# Altium PCB LED_Panel.PcbDoc
Units mil, origin at the board's own origin, x right, y up, seen from the top; angles counter-clockwise.
Board outline 1181.1 x 1181.1 mil, 2 copper layers (Top Layer, Bottom Layer); 128 components, 67 nets, 390 pads, 89 vias.
Unrouted connection lines stored in the file: 39.
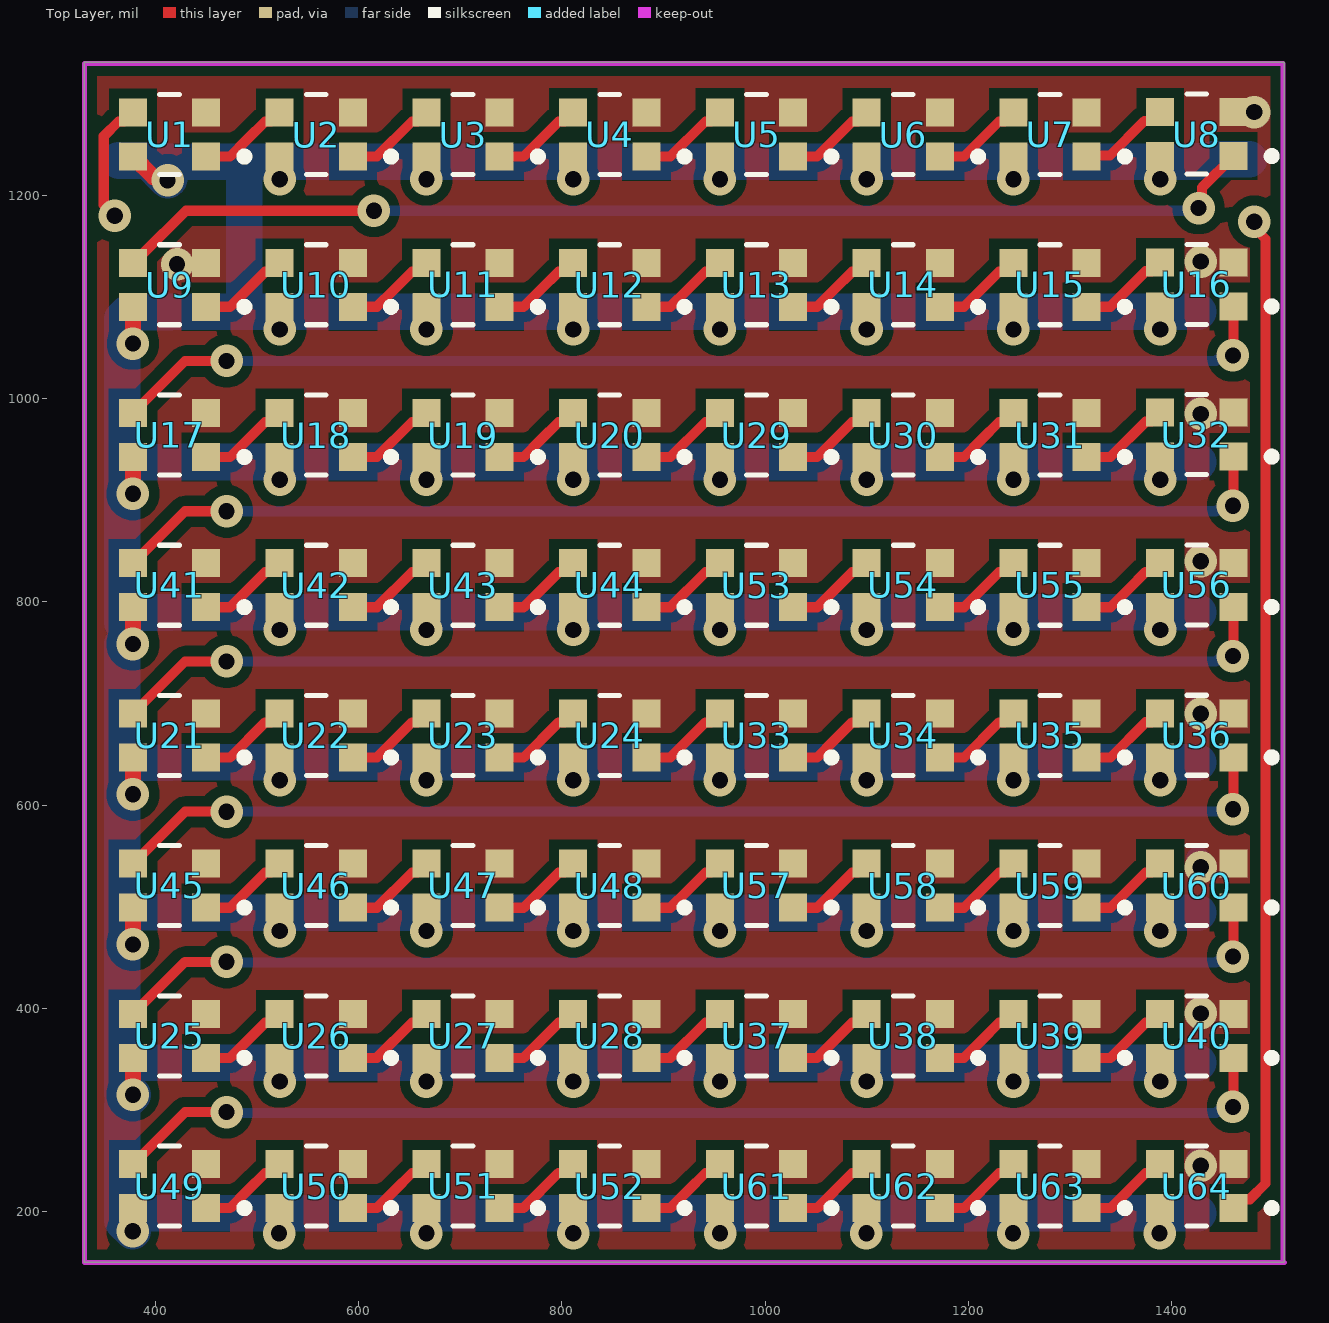
[diagram p0: Top Layer view]
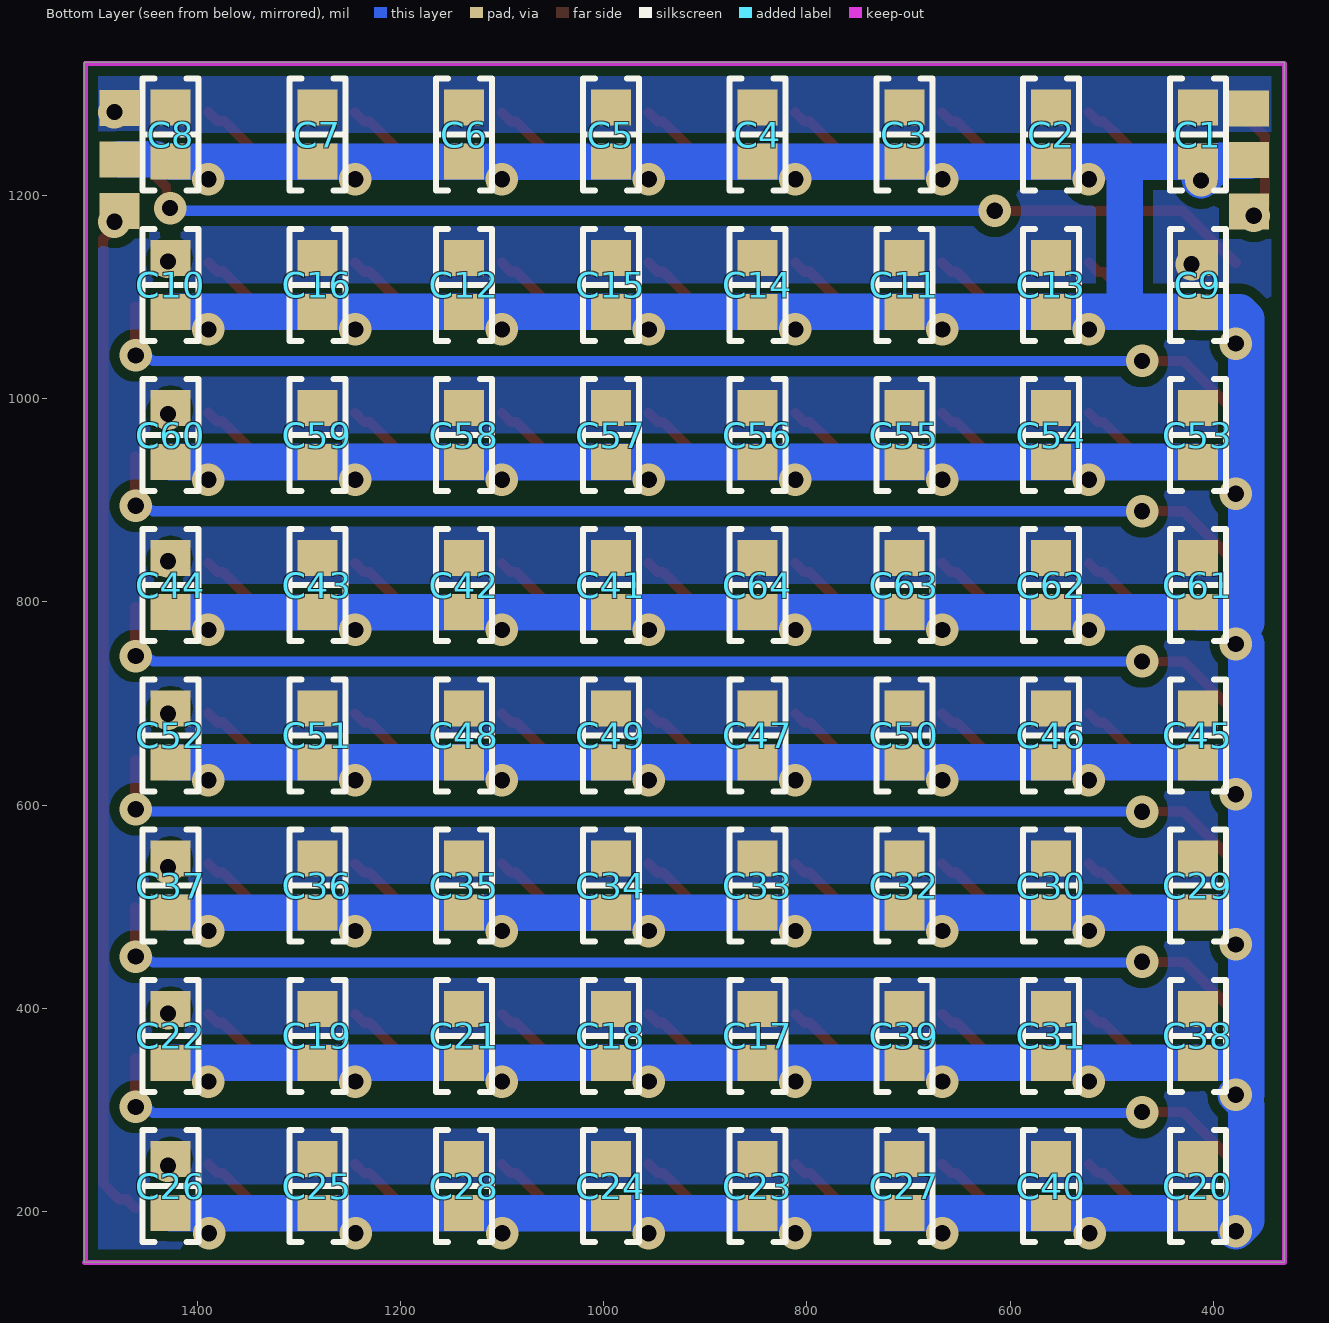
[diagram p1: Bottom Layer view, seen from below]
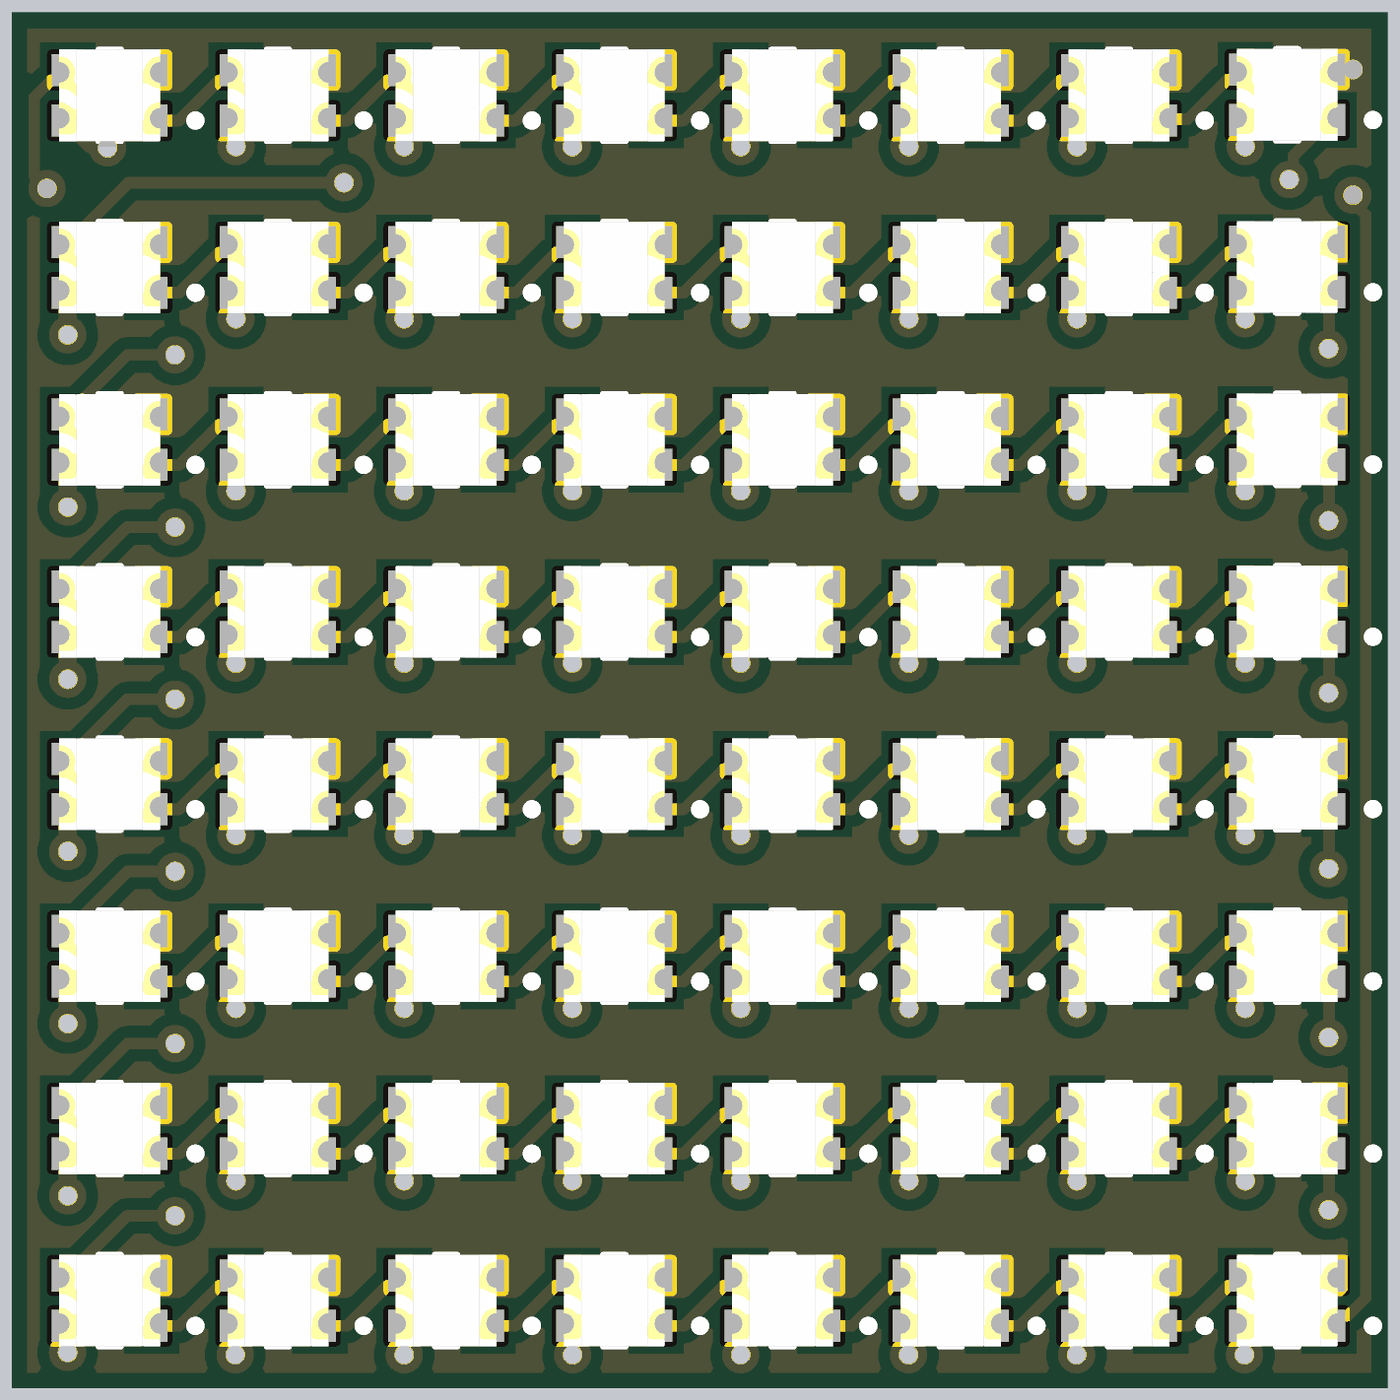
[diagram p2: 3D render of the assembled board from above, using the file's embedded part models]
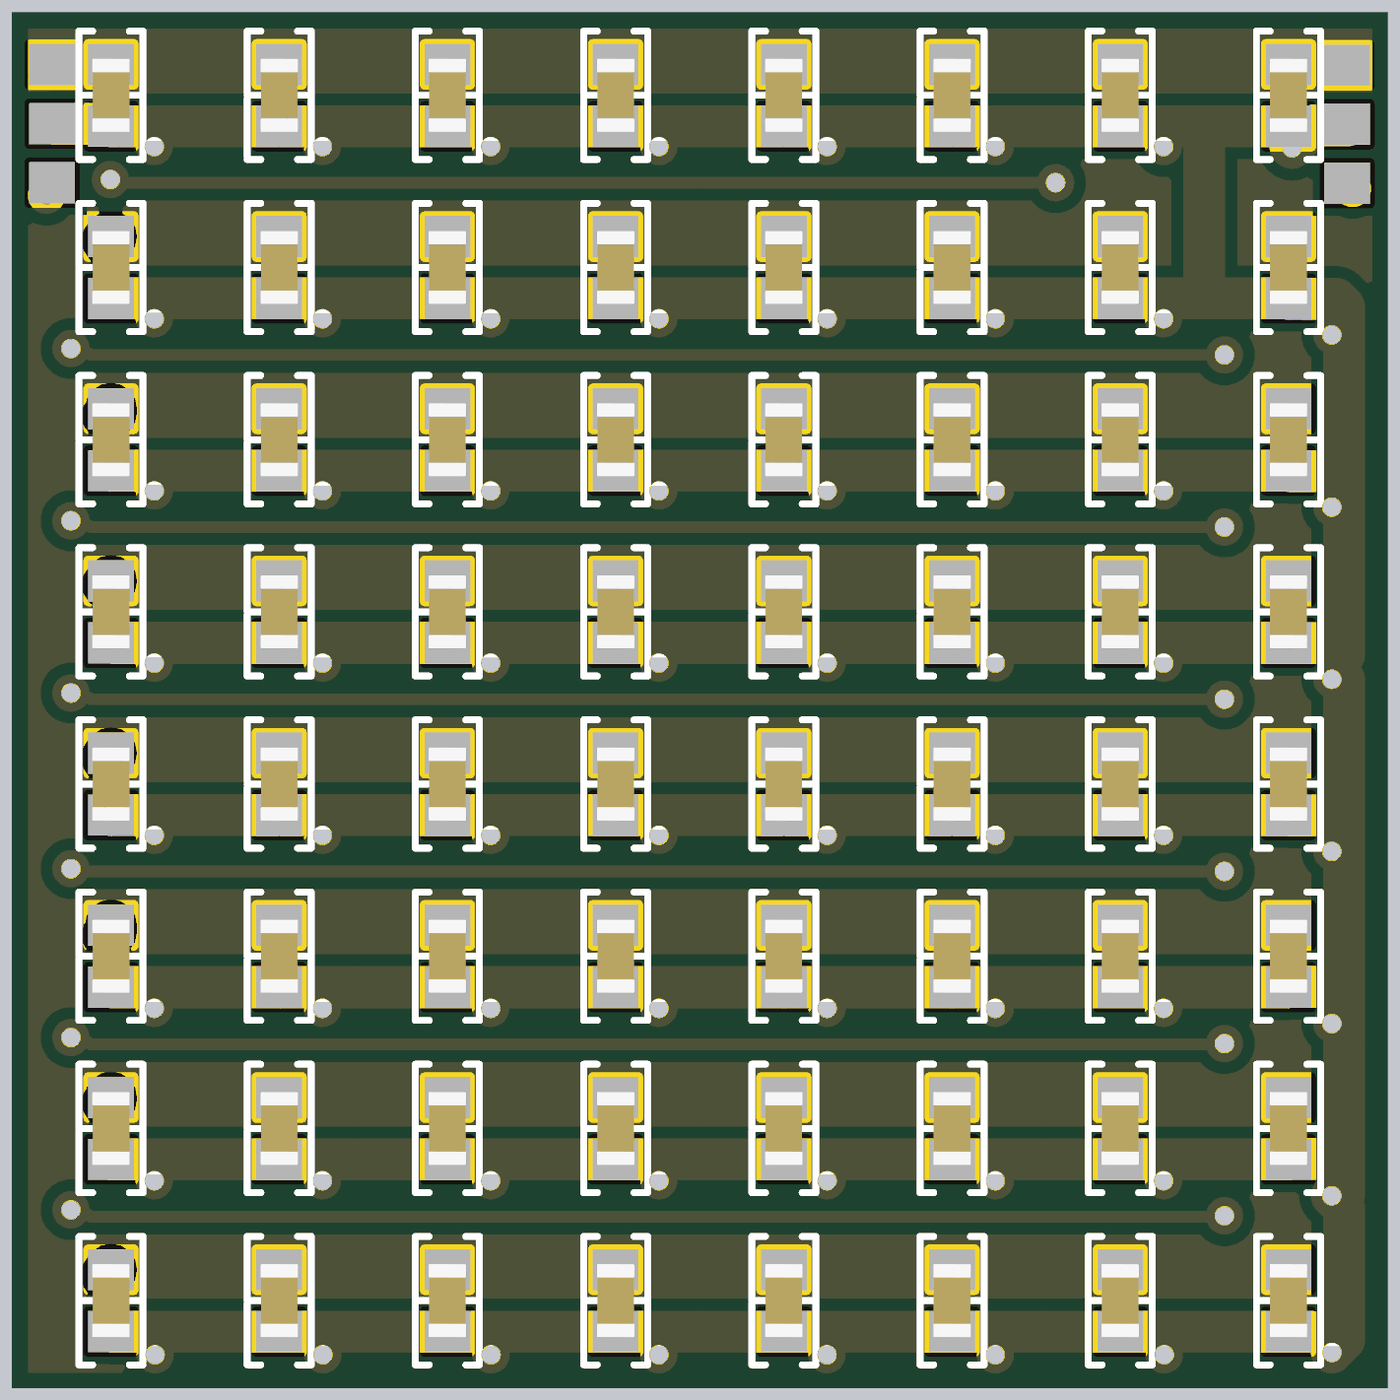
[diagram p3: 3D render of the assembled board from below, using the file's embedded part models]

## Layer stack, top to bottom
Top Solder: solder mask 0.4, Solder Resist, Dk 3.5
Top Layer: signal copper 1.4
Dielectric 1: dielectric 12.6, FR-4, Dk 4.8
Bottom Layer: signal copper 1.4
Bottom Solder: solder mask 0.4, Solder Resist, Dk 3.5

## Board outline
330,150 1511.1,150 1511.1,1331.1 330,1331.1

## Design rules (kind name [scope] priority, off if disabled: settings)
Clearance [All] p1: gap=10 ignorepadtopadclearanceinfootprint=FALSE except(0: Arc-Hole Track-Hole SMDPad-Hole THPad-Hole Via-Hole Fill-Hole Poly-Hole Region-Hole Text-Hole)
MinimumSolderMaskSliver [All] p1 off: minsoldermaskwidth=10
PolygonConnect PolygonConnect_2 [InNet('GND')] p1: connectstyle=Direct reliefconductorwidth=10 reliefentries=4 polygonreliefangle="90 Angle" airgapwidth=10
PolygonConnect PolygonConnect_1 [All] p2: connectstyle=Relief reliefconductorwidth=10 reliefentries=4 polygonreliefangle="90 Angle" airgapwidth=10
RoutingVias [All] p1: holewidth=16 width=32 viastyle="Through Hole" minholewidth=10 minwidth=10 maxholewidth=28 maxwidth=50
SilkToSilkClearance [All] p1 off: silktosilkclearance=10
SilkToSolderMaskClearance [IsPad] p1 off: minsilkscreentomaskgap=10 clearancetoexposedcopper=TRUE
SolderMaskExpansion [All] p1: expansion=4 istentingtop=FALSE
Width [All] p1: maxlimit=100 minlimit=10 preferedwidth=10
27 further rules are at their usual default settings.

## Components (designator, comment, footprint, x,y, rotation, side; value= is the part's Value field where it differs from the comment)
C1 "0.1uF" "CAP 0603_1608" 415,1260 r270 bottom
C2 "0.1uF" "CAP 0603_1608" 559.45,1260 r270 bottom
C3 "0.1uF" "CAP 0603_1608" 703.89,1260 r270 bottom
C4 "0.1uF" "CAP 0603_1608" 848.34,1260 r270 bottom
C5 "0.1uF" "CAP 0603_1608" 992.79,1260 r270 bottom
C6 "0.1uF" "CAP 0603_1608" 1137.24,1260 r270 bottom
C7 "0.1uF" "CAP 0603_1608" 1281.68,1260 r270 bottom
C8 "0.1uF" "CAP 0603_1608" 1426.13,1260 r270 bottom
C9 "0.1uF" "CAP 0603_1608" 415,1112.14 r270 bottom
C10 "0.1uF" "CAP 0603_1608" 1426.13,1112.14 r270 bottom
C11 "0.1uF" "CAP 0603_1608" 703.89,1112.14 r270 bottom
C12 "0.1uF" "CAP 0603_1608" 1137.24,1112.14 r270 bottom
C13 "0.1uF" "CAP 0603_1608" 559.45,1112.14 r270 bottom
C14 "0.1uF" "CAP 0603_1608" 848.34,1112.14 r270 bottom
C15 "0.1uF" "CAP 0603_1608" 992.79,1112.14 r270 bottom
C16 "0.1uF" "CAP 0603_1608" 1281.68,1112.14 r270 bottom
C17 "0.1uF" "CAP 0603_1608" 848.34,372.86 r270 bottom
C18 "0.1uF" "CAP 0603_1608" 992.79,372.86 r270 bottom
C19 "0.1uF" "CAP 0603_1608" 1281.68,372.86 r270 bottom
C20 "0.1uF" "CAP 0603_1608" 415,225 r270 bottom
C21 "0.1uF" "CAP 0603_1608" 1137.24,372.86 r270 bottom
C22 "0.1uF" "CAP 0603_1608" 1426.13,372.86 r270 bottom
C23 "0.1uF" "CAP 0603_1608" 848.34,225 r270 bottom
C24 "0.1uF" "CAP 0603_1608" 992.79,225 r270 bottom
C25 "0.1uF" "CAP 0603_1608" 1281.68,225 r270 bottom
C26 "0.1uF" "CAP 0603_1608" 1426.13,225 r270 bottom
C27 "0.1uF" "CAP 0603_1608" 703.89,225 r270 bottom
C28 "0.1uF" "CAP 0603_1608" 1137.24,225 r270 bottom
C29 "0.1uF" "CAP 0603_1608" 415,520.71 r270 bottom
C30 "0.1uF" "CAP 0603_1608" 559.45,520.71 r270 bottom
C31 "0.1uF" "CAP 0603_1608" 559.45,372.86 r270 bottom
C32 "0.1uF" "CAP 0603_1608" 703.89,520.71 r270 bottom
C33 "0.1uF" "CAP 0603_1608" 848.34,520.71 r270 bottom
C34 "0.1uF" "CAP 0603_1608" 992.79,520.71 r270 bottom
C35 "0.1uF" "CAP 0603_1608" 1137.24,520.71 r270 bottom
C36 "0.1uF" "CAP 0603_1608" 1281.68,520.71 r270 bottom
C37 "0.1uF" "CAP 0603_1608" 1426.13,520.71 r270 bottom
C38 "0.1uF" "CAP 0603_1608" 415,372.86 r270 bottom
C39 "0.1uF" "CAP 0603_1608" 703.89,372.86 r270 bottom
C40 "0.1uF" "CAP 0603_1608" 559.45,225 r270 bottom
C41 "0.1uF" "CAP 0603_1608" 992.79,816.43 r270 bottom
C42 "0.1uF" "CAP 0603_1608" 1137.24,816.43 r270 bottom
C43 "0.1uF" "CAP 0603_1608" 1281.68,816.43 r270 bottom
C44 "0.1uF" "CAP 0603_1608" 1426.13,816.43 r270 bottom
C45 "0.1uF" "CAP 0603_1608" 415,668.57 r270 bottom
C46 "0.1uF" "CAP 0603_1608" 559.45,668.57 r270 bottom
C47 "0.1uF" "CAP 0603_1608" 848.34,668.57 r270 bottom
C48 "0.1uF" "CAP 0603_1608" 1137.24,668.57 r270 bottom
C49 "0.1uF" "CAP 0603_1608" 992.79,668.57 r270 bottom
C50 "0.1uF" "CAP 0603_1608" 703.89,668.57 r270 bottom
C51 "0.1uF" "CAP 0603_1608" 1281.68,668.57 r270 bottom
C52 "0.1uF" "CAP 0603_1608" 1426.13,668.57 r270 bottom
C53 "0.1uF" "CAP 0603_1608" 415,964.29 r270 bottom
C54 "0.1uF" "CAP 0603_1608" 559.45,964.29 r270 bottom
C55 "0.1uF" "CAP 0603_1608" 703.89,964.29 r270 bottom
C56 "0.1uF" "CAP 0603_1608" 848.34,964.29 r270 bottom
C57 "0.1uF" "CAP 0603_1608" 992.79,964.29 r270 bottom
C58 "0.1uF" "CAP 0603_1608" 1137.24,964.29 r270 bottom
C59 "0.1uF" "CAP 0603_1608" 1281.68,964.29 r270 bottom
C60 "0.1uF" "CAP 0603_1608" 1426.13,964.29 r270 bottom
C61 "0.1uF" "CAP 0603_1608" 415,816.43 r270 bottom
C62 "0.1uF" "CAP 0603_1608" 559.45,816.43 r270 bottom
C63 "0.1uF" "CAP 0603_1608" 703.89,816.43 r270 bottom
C64 "0.1uF" "CAP 0603_1608" 848.34,816.43 r270 bottom
U1 "WS2812-2020" LED_WS2812-2020 413.87,1260 r0 top
U2 "WS2812-2020" LED_WS2812-2020 558.32,1260 r0 top
U3 "WS2812-2020" LED_WS2812-2020 702.76,1260 r0 top
U4 "WS2812-2020" LED_WS2812-2020 847.21,1260 r0 top
U5 "WS2812-2020" LED_WS2812-2020 991.66,1260 r0 top
U6 "WS2812-2020" LED_WS2812-2020 1136.1,1260 r0 top
U7 "WS2812-2020" LED_WS2812-2020 1280.55,1260 r0 top
U8 "WS2812-2020" LED_WS2812-2020 1425,1260.45 r0 top
U9 "WS2812-2020" LED_WS2812-2020 413.87,1112.14 r0 top
U10 "WS2812-2020" LED_WS2812-2020 558.32,1112.14 r0 top
U11 "WS2812-2020" LED_WS2812-2020 702.76,1112.14 r0 top
U12 "WS2812-2020" LED_WS2812-2020 847.21,1112.14 r0 top
U13 "WS2812-2020" LED_WS2812-2020 991.66,1112.14 r0 top
U14 "WS2812-2020" LED_WS2812-2020 1136.1,1112.14 r0 top
U15 "WS2812-2020" LED_WS2812-2020 1280.55,1112.14 r0 top
U16 "WS2812-2020" LED_WS2812-2020 1425,1112.53 r0 top
U17 "WS2812-2020" LED_WS2812-2020 413.87,964.29 r0 top
U18 "WS2812-2020" LED_WS2812-2020 558.32,964.29 r0 top
U19 "WS2812-2020" LED_WS2812-2020 702.76,964.29 r0 top
U20 "WS2812-2020" LED_WS2812-2020 847.21,964.29 r0 top
U21 "WS2812-2020" LED_WS2812-2020 413.87,668.57 r0 top
U22 "WS2812-2020" LED_WS2812-2020 558.32,668.57 r0 top
U23 "WS2812-2020" LED_WS2812-2020 702.76,668.57 r0 top
U24 "WS2812-2020" LED_WS2812-2020 847.21,668.57 r0 top
U25 "WS2812-2020" LED_WS2812-2020 413.87,372.86 r0 top
U26 "WS2812-2020" LED_WS2812-2020 558.32,372.86 r0 top
U27 "WS2812-2020" LED_WS2812-2020 702.76,372.86 r0 top
U28 "WS2812-2020" LED_WS2812-2020 847.21,372.86 r0 top
U29 "WS2812-2020" LED_WS2812-2020 991.66,964.29 r0 top
U30 "WS2812-2020" LED_WS2812-2020 1136.1,964.29 r0 top
U31 "WS2812-2020" LED_WS2812-2020 1280.55,964.29 r0 top
U32 "WS2812-2020" LED_WS2812-2020 1425,964.61 r0 top
U33 "WS2812-2020" LED_WS2812-2020 991.66,668.57 r0 top
U34 "WS2812-2020" LED_WS2812-2020 1136.1,668.57 r0 top
U35 "WS2812-2020" LED_WS2812-2020 1280.55,668.57 r0 top
U36 "WS2812-2020" LED_WS2812-2020 1425,668.76 r0 top
U37 "WS2812-2020" LED_WS2812-2020 991.66,372.86 r0 top
U38 "WS2812-2020" LED_WS2812-2020 1136.1,372.86 r0 top
U39 "WS2812-2020" LED_WS2812-2020 1280.55,372.86 r0 top
U40 "WS2812-2020" LED_WS2812-2020 1425,372.92 r0 top
U41 "WS2812-2020" LED_WS2812-2020 413.87,816.43 r0 top
U42 "WS2812-2020" LED_WS2812-2020 558.32,816.43 r0 top
U43 "WS2812-2020" LED_WS2812-2020 702.76,816.43 r0 top
U44 "WS2812-2020" LED_WS2812-2020 847.21,816.43 r0 top
U45 "WS2812-2020" LED_WS2812-2020 413.87,520.71 r0 top
U46 "WS2812-2020" LED_WS2812-2020 558.32,520.71 r0 top
U47 "WS2812-2020" LED_WS2812-2020 702.76,520.71 r0 top
U48 "WS2812-2020" LED_WS2812-2020 847.21,520.71 r0 top
U49 "WS2812-2020" LED_WS2812-2020 413.87,225 r0 top
U50 "WS2812-2020" LED_WS2812-2020 558.32,225 r0 top
U51 "WS2812-2020" LED_WS2812-2020 702.76,225 r0 top
U52 "WS2812-2020" LED_WS2812-2020 847.21,225 r0 top
U53 "WS2812-2020" LED_WS2812-2020 991.66,816.43 r0 top
U54 "WS2812-2020" LED_WS2812-2020 1136.1,816.43 r0 top
U55 "WS2812-2020" LED_WS2812-2020 1280.55,816.43 r0 top
U56 "WS2812-2020" LED_WS2812-2020 1425,816.68 r0 top
U57 "WS2812-2020" LED_WS2812-2020 991.66,520.71 r0 top
U58 "WS2812-2020" LED_WS2812-2020 1136.1,520.71 r0 top
U59 "WS2812-2020" LED_WS2812-2020 1280.55,520.71 r0 top
U60 "WS2812-2020" LED_WS2812-2020 1425,520.84 r0 top
U61 "WS2812-2020" LED_WS2812-2020 991.66,225 r0 top
U62 "WS2812-2020" LED_WS2812-2020 1136.1,225 r0 top
U63 "WS2812-2020" LED_WS2812-2020 1280.55,225 r0 top
U64 "WS2812-2020" LED_WS2812-2020 1425,225 r0 top

## Footprints (in the part's own frame and the unit in brackets; to place one, negate y for a bottom-side part, rotate by r counter-clockwise, add the part's x,y. Pads: shape width x height; smd on the part's side, far side on the other; paste and mask are expansions set on the pad)
"CAP 0603_1608" [mm] "Chip Capacitor, 2-Leads, Body 1.60x0.80mm, IPC Medium Density"
  rect 0.9x1 smd: 1(-0.675,0) 2(0.675,0)
  silkscreen extent -1.4,-0.7 1.4,0.7, body extent -0.8,-0.41 0.8,0.41, height 0.82
LED_WS2812-2020 [mm]
  rect 0.7x0.7 smd: 1(0.915,-0.55) 2(0.915,0.55) 3(-0.915,0.55) 4(-0.915,-0.55)
  silkscreen extent -0.25,-1 1.97,1, body extent -1.1,-1 1.1,1, height 0.84

## Part data
C1 C2 C3 C4 C5 C6 C7 C8 C9 C10 C11 C12 C13 C14 C15 C16 C17 C18 C19 C20 C21 C22 C23 C24 C25 C26 C27 C28 C29 C30 C31 C32 C33 C34 C35 C36 C37 C38 C39 C40 C41 C42 C43 C44 C45 C46 C47 C48 C49 C50 C51 C52 C53 C54 C55 C56 C57 C58 C59 C60 C61 C62 C63 C64: library part C0603C272F3GAC7867, "CAP CER 2700PF 25V NP0 0603", Capacitance="2700 pF", Device Package="0603 (1608 Metric)", manufacturer=KEMET, Operating Temperature="-55°C ~ 125°C", Supplier Part Number 1=399-17403-1-ND, Temperature Coefficient="C0G, NP0", Tolerance=±1%, Voltage - Rated=25V, Applications="General Purpose", componentlink1description=Datasheet, componentlink1url=https://api.kemet.com/component-edge/download/datasheet/C0603C272F3GACTU.pdf, componentlink2description="DigiKey Link", componentlink2url=https://www.digikey.com/en/products/detail/kemet/C0603C272F3GAC7867/2200413, Features="Low ESL", lastupdated="2022/5/23 下午 12:55:07", Lifecycle Status=Active, Minimum Order=1, Mounting Type="Surface Mount, MLCC", Package / Case="0603 (1608 Metric)", packaging=TapeAndReel, Part Number=C0603C272F3GAC7867, Part Status=Active, partid=2138, price=0.46, series="SMD Comm C0G", Size / Dimension="0.063\" L x 0.031\" W (1.60mm x 0.80mm)", Supplier 1=DigiKey, Thickness (Max)="0.034\" (0.87mm)"
U1 U2 U3 U4 U5 U6 U7 U8 U9 U10 U11 U12 U13 U14 U15 U16 U17 U18 U19 U20 U21 U22 U23 U24 U25 U26 U27 U28 U29 U30 U31 U32 U33 U34 U35 U36 U37 U38 U39 U40 U41 U42 U43 U44 U45 U46 U47 U48 U49 U50 U51 U52 U53 U54 U55 U56 U57 U58 U59 U60 U61 U62 U63 U64: Package=None, Availability=Unavailable, MF="{'manufacturer': u'Worldsemi'}", MP=WS2812-2020, price=None

## Free pads (board coordinates)
  rect 39.37x35.43 smd far side: 1(364.63,1235.11) 1(1476.7,1235.66) 2(364.63,1184.45) 2(1476.7,1185) 3(364.63,1285.76) 3(1476.7,1286.32)

## Via types
v1: diameter 32, hole 16, Top Layer to Bottom Layer, tented both sides, 89 vias

## Nets (pads, with @x,y where several pads share a name; then routed paths per layer and width w, separated by ;. In a path a pad name is that pad's centre, name@x,y a point inside that pad or via, vN(x,y) a via of type N, cw(c..) or ccw(c..) an arc to the next point about the centre after c; other vN are vias at no path point)
DIN: pad.2@364.63,1184.45 U1.3 | length 126.3
  Top Layer w10: v1(360,1180) 349.06,1190.93 349.06,1258.34 363.6,1272.87 369.06,1272.87 U1.3
  Bottom Layer w10: pad.2@360,1175 v1(360,1180)
DO1: U4.1 U5.3 | length 90.3
  Top Layer w10: U4.1 906.86,1238.35 941.39,1272.87 946.85,1272.87 U5.3
DO2: U8.1 U9.3 | length 1136.5
  Top Layer w10: U9.3 386.62,1142.58 387.58,1142.58 430,1185 v1(615,1185) ; v1(1426.68,1187.68) 1430.21,1191.21 1430.21,1207.98 U8.1
  Bottom Layer w10: v1(615,1185) 1424,1185 v1(1426.68,1187.68)
DO3: U12.1 U13.3 | length 90.3
  Top Layer w10: U12.1 906.86,1090.49 923.83,1107.45 941.39,1125.02 946.85,1125.02 U13.3
DO4: U16.1 U17.3 | length 1153.9
  Top Layer w10: U17.3 429.05,1037.14 v1(470,1037.14) ; v1@1461.02,1043.1 U16.1
  Bottom Layer w10: v1(470,1037.14) 1443.65,1037.14 1444.89,1038.38 1456.3,1038.38 v1(1460.51,1042.59)
DO5: U20.1 U29.3 | length 90.3
  Top Layer w10: U20.1 906.86,942.63 941.39,977.16 946.85,977.16 U29.3
DO6: U32.1 U41.3 | length 1153.9
  Top Layer w10: U41.3 429.05,889.29 v1(470,889.29) ; v1@1461.02,895.18 U32.1
  Bottom Layer w10: v1(470,889.29) 1415.21,889.29 1443.65,889.29 1444.83,890.46 1456.3,890.46 v1(1460.51,894.67)
DO7: U44.1 U53.3 | length 90.3
  Top Layer w10: U44.1 906.86,794.77 941.39,829.3 946.85,829.3 U53.3
DO8: U21.3 U56.1 | length 1153.9
  Top Layer w10: U21.3 429.05,741.43 v1(470,741.43) ; v1@1461.02,747.26 U56.1
  Bottom Layer w10: v1(470,741.43) 1443.65,741.43 1444.76,742.54 1456.3,742.54 v1(1460.51,746.75)
DO9: U24.1 U33.3 | length 90.3
  Top Layer w10: U24.1 906.86,646.92 941.39,681.45 946.85,681.45 U33.3
DO10: U36.1 U45.3 | length 1152.6
  Top Layer w10: U45.3 429.05,593.57 v1(470,593.57) ; v1@1461.02,596.42 U36.1@1461.02,644.19
  Bottom Layer w10: v1(470,593.57) 1458.18,593.57 v1(1460.51,595.91)
DO11: U48.1 U57.3 | length 90.3
  Top Layer w10: U48.1 906.86,499.06 923.83,516.03 941.39,533.59 946.85,533.59 U57.3
DO12: U25.3 U60.1 | length 1154.4
  Top Layer w10: U25.3 429.05,445.71 v1(470,445.71) ; v1@1461.02,451.42 U60.1
  Bottom Layer w10: v1(470,445.71) 470.71,445 1443.65,445 1445.35,446.7 1456.3,446.7 v1(1460.51,450.91)
DO13: U28.1 U37.3 | length 90.3
  Top Layer w10: U28.1 906.86,351.2 941.39,385.73 946.85,385.73 U37.3
DO14: U40.1 U49.3 | length 1154.5
  Top Layer w10: U49.3 429.05,297.86 v1(470,297.86) ; v1@1461.02,303.5 U40.1
  Bottom Layer w10: v1(470,297.86) 470.9,296.96 1443.65,296.96 1445.47,298.77 1456.3,298.77 v1(1460.51,302.98)
DO15: U52.1 U61.3 | length 90.3
  Top Layer w10: U52.1 906.86,203.35 923.83,220.31 941.39,237.87 946.85,237.87 U61.3
DOUT: pad.2@1476.7,1185 U64.1 | length 1003.6
  Top Layer w10: U64.1 1469.8,212.13 1477.13,212.13 1492.5,227.5 1492.5,1157.25 1481.5,1168.25 v1(1481.5,1174.2)
  Bottom Layer w10: v1(1481.5,1174.2) 1481.5,1184.8 pad.2@1481.7,1185
GND: C1.1 C2.1 C3.1 C4.1 C5.1 C6.1 C7.1 C8.1 C9.1 C10.1 C11.1 C12.1 C13.1 C14.1 C15.1 C16.1 C17.1 C18.1 C19.1 C20.1 C21.1 C22.1 C23.1 C24.1 C25.1 C26.1 C27.1 C28.1 C29.1 C30.1 C31.1 C32.1 C33.1 C34.1 C35.1 C36.1 C37.1 C38.1 C39.1 C40.1 C41.1 C42.1 C43.1 C44.1 C45.1 C46.1 C47.1 C48.1 C49.1 C50.1 C51.1 C52.1 C53.1 C54.1 C55.1 C56.1 C57.1 C58.1 C59.1 C60.1 C61.1 C62.1 C63.1 C64.1 pad.3 U1.2 U2.2 U3.2 U4.2 U5.2 U6.2 U7.2 U8.2 U9.2 U10.2 U11.2 U12.2 U13.2 U14.2 U15.2 U16.2 U17.2 U18.2 U19.2 U20.2 U21.2 U22.2 U23.2 U24.2 U25.2 U26.2 U27.2 U28.2 U29.2 U30.2 U31.2 U32.2 U33.2 U34.2 U35.2 U36.2 U37.2 U38.2 U39.2 U40.2 U41.2 U42.2 U43.2 U44.2 U45.2 U46.2 U47.2 U48.2 U49.2 U50.2 U51.2 U52.2 U53.2 U54.2 U55.2 U56.2 U57.2 U58.2 U59.2 U60.2 U61.2 U62.2 U63.2 U64.2 | length 44.7
  Bottom Layer w24: C26.1 1428.76,248.95 v1(1428.76,245) ; C22.1 1426.13,397.62 v1(1428.76,395) ; C37.1 1426.13,541.59 v1(1428.76,538.97) ; C52.1 1428.76,692.52 v1(1428.76,690) ; C44.1 1426.13,842.62 v1(1428.76,840) ; C60.1 1426.13,987.62 v1(1428.76,985) ; C10.1 1428.76,1136.09 v1(1428.76,1135)
  other v1: 421.28,1132.44 1481.5,1282.17
NetU1_1: U1.1 U2.3 | length 90.3
  Top Layer w10: U1.1 473.52,1238.35 490.49,1255.31 508.05,1272.87 513.51,1272.87 U2.3
NetU2_1: U2.1 U3.3 | length 90.3
  Top Layer w10: U2.1 617.97,1238.35 652.49,1272.87 657.96,1272.87 U3.3
NetU3_1: U3.1 U4.3 | length 90.3
  Top Layer w10: U3.1 762.41,1238.35 796.94,1272.87 802.41,1272.87 U4.3
NetU5_1: U5.1 U6.3 | length 90.3
  Top Layer w10: U5.1 1051.31,1238.35 1085.84,1272.87 1091.3,1272.87 U6.3
NetU6_1: U6.1 U7.3 | length 90.3
  Top Layer w10: U6.1 1195.76,1238.35 1230.28,1272.87 1235.75,1272.87 U7.3
NetU7_1: U7.1 U8.3 | length 90.5
  Top Layer w10: U7.1 1317.65,1239.42 1339.5,1239.42 1373.4,1273.32 1380.2,1273.32 U8.3
NetU9_1: U9.1 U10.3 | length 90.3
  Top Layer w10: U9.1 473.52,1090.49 508.05,1125.02 513.51,1125.02 U10.3
NetU10_1: U10.1 U11.3 | length 90.3
  Top Layer w10: U10.1 617.97,1090.49 634.93,1107.45 652.49,1125.02 657.96,1125.02 U11.3
NetU11_1: U11.1 U12.3 | length 90.3
  Top Layer w10: U11.1 762.41,1090.49 779.38,1107.45 796.94,1125.02 802.41,1125.02 U12.3
NetU13_1: U13.1 U14.3 | length 90.3
  Top Layer w10: U13.1 1051.31,1090.49 1068.27,1107.45 1085.84,1125.02 1091.3,1125.02 U14.3
NetU14_1: U14.1 U15.3 | length 90.3
  Top Layer w10: U14.1 1195.76,1090.49 1230.28,1125.02 1235.75,1125.02 U15.3
NetU15_1: U15.1 U16.3 | length 90.5
  Top Layer w10: U15.1 1339.82,1090.49 1374.73,1125.4 1380.2,1125.4 U16.3
NetU17_1: U17.1 U18.3 | length 90.3
  Top Layer w10: U17.1 473.52,942.63 508.05,977.16 513.51,977.16 U18.3
NetU18_1: U18.1 U19.3 | length 90.3
  Top Layer w10: U18.1 617.97,942.63 652.49,977.16 657.96,977.16 U19.3
NetU19_1: U19.1 U20.3 | length 90.3
  Top Layer w10: U19.1 762.41,942.63 779.38,959.6 796.94,977.16 802.41,977.16 U20.3
NetU21_1: U21.1 U22.3 | length 90.3
  Top Layer w10: U21.1 473.52,646.92 508.05,681.45 513.51,681.45 U22.3
NetU22_1: U22.1 U23.3 | length 90.3
  Top Layer w10: U22.1 617.97,646.92 652.49,681.45 657.96,681.45 U23.3
NetU23_1: U23.1 U24.3 | length 90.3
  Top Layer w10: U23.1 762.41,646.92 796.94,681.45 802.41,681.45 U24.3
NetU25_1: U25.1 U26.3 | length 90.3
  Top Layer w10: U25.1 473.52,351.2 490.49,368.17 508.05,385.73 513.51,385.73 U26.3
NetU26_1: U26.1 U27.3 | length 90.3
  Top Layer w10: U26.1 617.97,351.2 652.49,385.73 657.96,385.73 U27.3
NetU27_1: U27.1 U28.3 | length 90.3
  Top Layer w10: U27.1 762.41,351.2 779.38,368.17 796.94,385.73 802.41,385.73 U28.3
NetU29_1: U29.1 U30.3 | length 90.3
  Top Layer w10: U29.1 1051.31,942.63 1085.84,977.16 1091.3,977.16 U30.3
NetU30_1: U30.1 U31.3 | length 90.3
  Top Layer w10: U30.1 1195.76,942.63 1212.72,959.6 1230.28,977.16 1235.75,977.16 U31.3
NetU31_1: U31.1 U32.3 | length 90.5
  Top Layer w10: U31.1 1339.88,942.63 1374.73,977.48 1380.2,977.48 U32.3
NetU33_1: U33.1 U34.3 | length 90.3
  Top Layer w10: U33.1 1051.31,646.92 1068.27,663.88 1085.84,681.45 1091.3,681.45 U34.3
NetU34_1: U34.1 U35.3 | length 90.3
  Top Layer w10: U34.1 1195.76,646.92 1230.28,681.45 1235.75,681.45 U35.3
NetU35_1: U35.1 U36.3 | length 90.4
  Top Layer w10: U35.1 1340.01,646.92 1374.73,681.64 1380.2,681.64 U36.3
NetU37_1: U37.1 U38.3 | length 90.3
  Top Layer w10: U37.1 1051.31,351.2 1085.84,385.73 1091.3,385.73 U38.3
NetU38_1: U38.1 U39.3 | length 90.3
  Top Layer w10: U38.1 1195.76,351.2 1212.72,368.17 1230.28,385.73 1235.75,385.73 U39.3
NetU39_1: U39.1 U40.3 | length 90.4
  Top Layer w10: U39.1 1340.14,351.2 1374.73,385.8 1380.2,385.8 U40.3
NetU41_1: U41.1 U42.3 | length 90.3
  Top Layer w10: U41.1 473.52,794.77 508.05,829.3 513.51,829.3 U42.3
NetU42_1: U42.1 U43.3 | length 90.3
  Top Layer w10: U42.1 617.97,794.77 652.49,829.3 657.96,829.3 U43.3
NetU43_1: U43.1 U44.3 | length 90.3
  Top Layer w10: U43.1 762.41,794.77 796.94,829.3 802.41,829.3 U44.3
NetU45_1: U45.1 U46.3 | length 90.3
  Top Layer w10: U45.1 473.52,499.06 508.05,533.59 513.51,533.59 U46.3
NetU46_1: U46.1 U47.3 | length 90.3
  Top Layer w10: U46.1 617.97,499.06 652.49,533.59 657.96,533.59 U47.3
NetU47_1: U47.1 U48.3 | length 90.3
  Top Layer w10: U47.1 762.41,499.06 796.94,533.59 802.41,533.59 U48.3
NetU49_1: U49.1 U50.3 | length 90.3
  Top Layer w10: U49.1 473.52,203.35 490.49,220.31 508.05,237.87 513.51,237.87 U50.3
NetU50_1: U50.1 U51.3 | length 90.3
  Top Layer w10: U50.1 617.97,203.35 634.93,220.31 652.49,237.87 657.96,237.87 U51.3
NetU51_1: U51.1 U52.3 | length 90.3
  Top Layer w10: U51.1 762.08,203.35 796.61,237.87 802.41,237.87 U52.3
NetU53_1: U53.1 U54.3 | length 90.3
  Top Layer w10: U53.1 1051.31,794.77 1085.84,829.3 1091.3,829.3 U54.3
NetU54_1: U54.1 U55.3 | length 90.3
  Top Layer w10: U54.1 1195.76,794.77 1230.28,829.3 1235.75,829.3 U55.3
NetU55_1: U55.1 U56.3 | length 90.4
  Top Layer w10: U55.1 1339.95,794.77 1357.17,812 1374.73,829.56 1380.2,829.56 U56.3
NetU57_1: U57.1 U58.3 | length 90.3
  Top Layer w10: U57.1 1051.31,499.06 1085.84,533.59 1091.3,533.59 U58.3
NetU58_1: U58.1 U59.3 | length 90.3
  Top Layer w10: U58.1 1195.76,499.06 1230.28,533.59 1235.75,533.59 U59.3
NetU59_1: U59.1 U60.3 | length 90.4
  Top Layer w10: U59.1 1340.08,499.06 1374.73,533.72 1380.2,533.72 U60.3
NetU61_1: U61.1 U62.3 | length 90.3
  Top Layer w10: U61.1 1051.31,203.35 1085.84,237.87 1091.3,237.87 U62.3
NetU62_1: U62.1 U63.3 | length 90.3
  Top Layer w10: U62.1 1195.76,203.35 1230.28,237.87 1235.75,237.87 U63.3
NetU63_1: U63.1 U64.3 | length 90.3
  Top Layer w10: U63.1 1340.2,203.35 1374.73,237.87 1380.2,237.87 U64.3
VCC5V: C1.2 C2.2 C3.2 C4.2 C5.2 C6.2 C7.2 C8.2 C9.2 C10.2 C11.2 C12.2 C13.2 C14.2 C15.2 C16.2 C17.2 C18.2 C19.2 C20.2 C21.2 C22.2 C23.2 C24.2 C25.2 C26.2 C27.2 C28.2 C29.2 C30.2 C31.2 C32.2 C33.2 C34.2 C35.2 C36.2 C37.2 C38.2 C39.2 C40.2 C41.2 C42.2 C43.2 C44.2 C45.2 C46.2 C47.2 C48.2 C49.2 C50.2 C51.2 C52.2 C53.2 C54.2 C55.2 C56.2 C57.2 C58.2 C59.2 C60.2 C61.2 C62.2 C63.2 C64.2 pad.1 U1.4 U2.4 U3.4 U4.4 U5.4 U6.4 U7.4 U8.4 U9.4 U10.4 U11.4 U12.4 U13.4 U14.4 U15.4 U16.4 U17.4 U18.4 U19.4 U20.4 U21.4 U22.4 U23.4 U24.4 U25.4 U26.4 U27.4 U28.4 U29.4 U30.4 U31.4 U32.4 U33.4 U34.4 U35.4 U36.4 U37.4 U38.4 U39.4 U40.4 U41.4 U42.4 U43.4 U44.4 U45.4 U46.4 U47.4 U48.4 U49.4 U50.4 U51.4 U52.4 U53.4 U54.4 U55.4 U56.4 U57.4 U58.4 U59.4 U60.4 U61.4 U62.4 U63.4 U64.4 | length 10946.1
  Top Layer w16: v1(377.84,315.01) U25.4 ; v1(377.84,462.87) U45.4 ; v1(377.84,610.73) U21.4 ; v1(377.84,758.58) U41.4 ; v1(377.84,906.44) U17.4 ; v1(377.84,1054.3) U9.4 ; U1.4 398.23,1217.96 408.92,1217.96 v1(411.98,1214.89) ; v1(522.29,327.96) U26.4 ; v1(522.29,476) U46.4 ; v1(522.29,624.57) U22.4 ; v1(522.29,772.43) U42.4 ; v1(522.29,920.29) U18.4 ; v1(522.29,1068.14) U10.4 ; v1(522.29,1216) U2.4 ; v1(666.74,327.96) U27.4 ; v1(666.74,476) U47.4 ; v1(666.74,624.57) U23.4 ; v1(666.74,772.43) U43.4 ; v1(666.74,920.29) U19.4 ; v1(666.74,1068.14) U11.4 ; v1(666.74,1216) U3.4 ; v1(811.19,327.96) U28.4 ; v1(811.19,476) U48.4 ; v1(811.19,624.57) U24.4 ; v1(811.19,772.43) U44.4 ; v1(811.19,920.29) U20.4 ; v1(811.19,1068.14) U12.4 ; v1(811.19,1216) U4.4 ; v1(955.63,327.96) U37.4 ; v1(955.63,476) U57.4 ; v1(955.63,624.57) U33.4 ; v1(955.63,772.43) U53.4 ; v1(955.63,920.29) U29.4 ; v1(955.63,1068.14) U13.4 ; v1(955.63,1216) U5.4 ; v1(1100.08,327.96) U38.4 ; v1(1100.08,476) U58.4 ; v1(1100.08,624.57) U34.4 ; v1(1100.08,772.43) U54.4 ; v1(1100.08,920.29) U30.4 ; v1(1100.08,1068.14) U14.4 ; v1(1100.08,1216) U6.4 ; v1(1244.53,327.96) U39.4 ; v1(1244.53,476) U59.4 ; v1(1244.53,624.57) U35.4 ; v1(1244.53,772.43) U55.4 ; v1(1244.53,920.29) U31.4 ; v1(1244.53,1068.14) U15.4 ; v1(1244.53,1216) U7.4 ; v1(1388.98,327.96) U40.4 U40.4@1388.98,351.65 ; v1(1388.98,476) U60.4 U60.4@1388.98,499.51 ; v1(1388.98,624.57) U36.4 U36.4@1388.98,647.37 ; v1(1388.98,772.43) U56.4 U56.4@1388.98,795.22 ; v1(1388.98,920.29) U32.4 U32.4@1388.98,943.08 ; v1(1388.98,1068.14) U16.4 U16.4 ; v1(1388.98,1216) U8.4
  Bottom Layer w16: v1(377.84,758.58) v1@381.76,758.58
  Bottom Layer w36: pad.1@364.06,1234.53 364.34,1234.25 392.62,1234.25 v1(411.98,1214.89) 413.31,1216.23 413.31,1233.14 413.6,1233.42 C1.2 487.22,1233.42 ; v1@367.31,315.01 367.31,350 ; v1@367.31,758.58 367.31,634.96 ; v1(377.71,180.5) 367.31,190.9 367.31,280.89 367.31,304.48 v1(377.84,315.01) ; C20.2@395.36,198.14 414.72,198.14 C20.2 C40.2 C27.2 C23.2 C24.2 C28.2 C25.2 C26.2 ; C22.2 C19.2 C21.2 C18.2 C17.2 C39.2 C31.2 C38.2 414.72,346.57 370.75,346.57 367.31,350 ; C37.2 C36.2 C35.2 C34.2 C33.2 C32.2 C30.2 C29.2 414.72,494.42 367.89,494.42 367.31,495 ; C52.2 C51.2 C48.2 C49.2 C47.2 C50.2 C46.2 C45.2 414.72,641.71 374.07,641.71 367.31,634.96 ; C44.2 C43.2 C42.2 C41.2 C64.2 C63.2 C62.2 C61.2 414.72,789.57 377.5,789.57 367.31,779.39 367.31,930.67 ; C60.2 C59.2 C58.2 C57.2 C56.2 C55.2 C54.2 C53.2 414.72,937.43 374.07,937.43 367.31,930.67 ; C10.2 C16.2 C12.2 C15.2 C14.2 C11.2 C13.2 487.22,1085.57 ; pad.1@1476.7,1235.66 1440.71,1235.66 1438.76,1233.71 1426.42,1233.71 C8.2 1388.98,1233.42 C7.2 C6.2 C5.2 C4.2 C3.2 C2.2 487.22,1233.42 ; 367.31,350 367.31,495 ; 367.31,495 367.31,634.96 ; 367.31,930.67 367.31,1078.53 374.07,1085.28 414.72,1085.28 C9.2 487.22,1085.57 ; 487.22,1085.57 487.22,1233.42
  other v1: 521.69,178.5 666.77,178.5 811.34,178.5 955.69,178.5 1099.8,178.5 1244.16,178.5 1388.29,178.5

## Polygon pours and split planes (outlines as drawn)
GND on Top Layer "GND_L01_P000" (solid, pour order 0): 330,150 1511.1,150 1511.1,1331.1 330,1331.1
GND on Bottom Layer "GND_L02_P001" (solid, pour order 1): 330,150 1511.1,150 1511.1,1331.1 330,1331.1

## Keep-outs
Keep-Out Layer:
  lines w5: 330,150 330,1330 1510,1330 1510,151.1 1511.1,150 330,150